# Altium PCB PCB1.pcbdoc
Units mil, origin at the board's own origin, x right, y up, seen from the top; angles counter-clockwise.
Board outline 7520 x 4820 mil, 2 copper layers (Top Layer, Bottom Layer); 59 components, 55 nets, 250 pads, 49 vias.
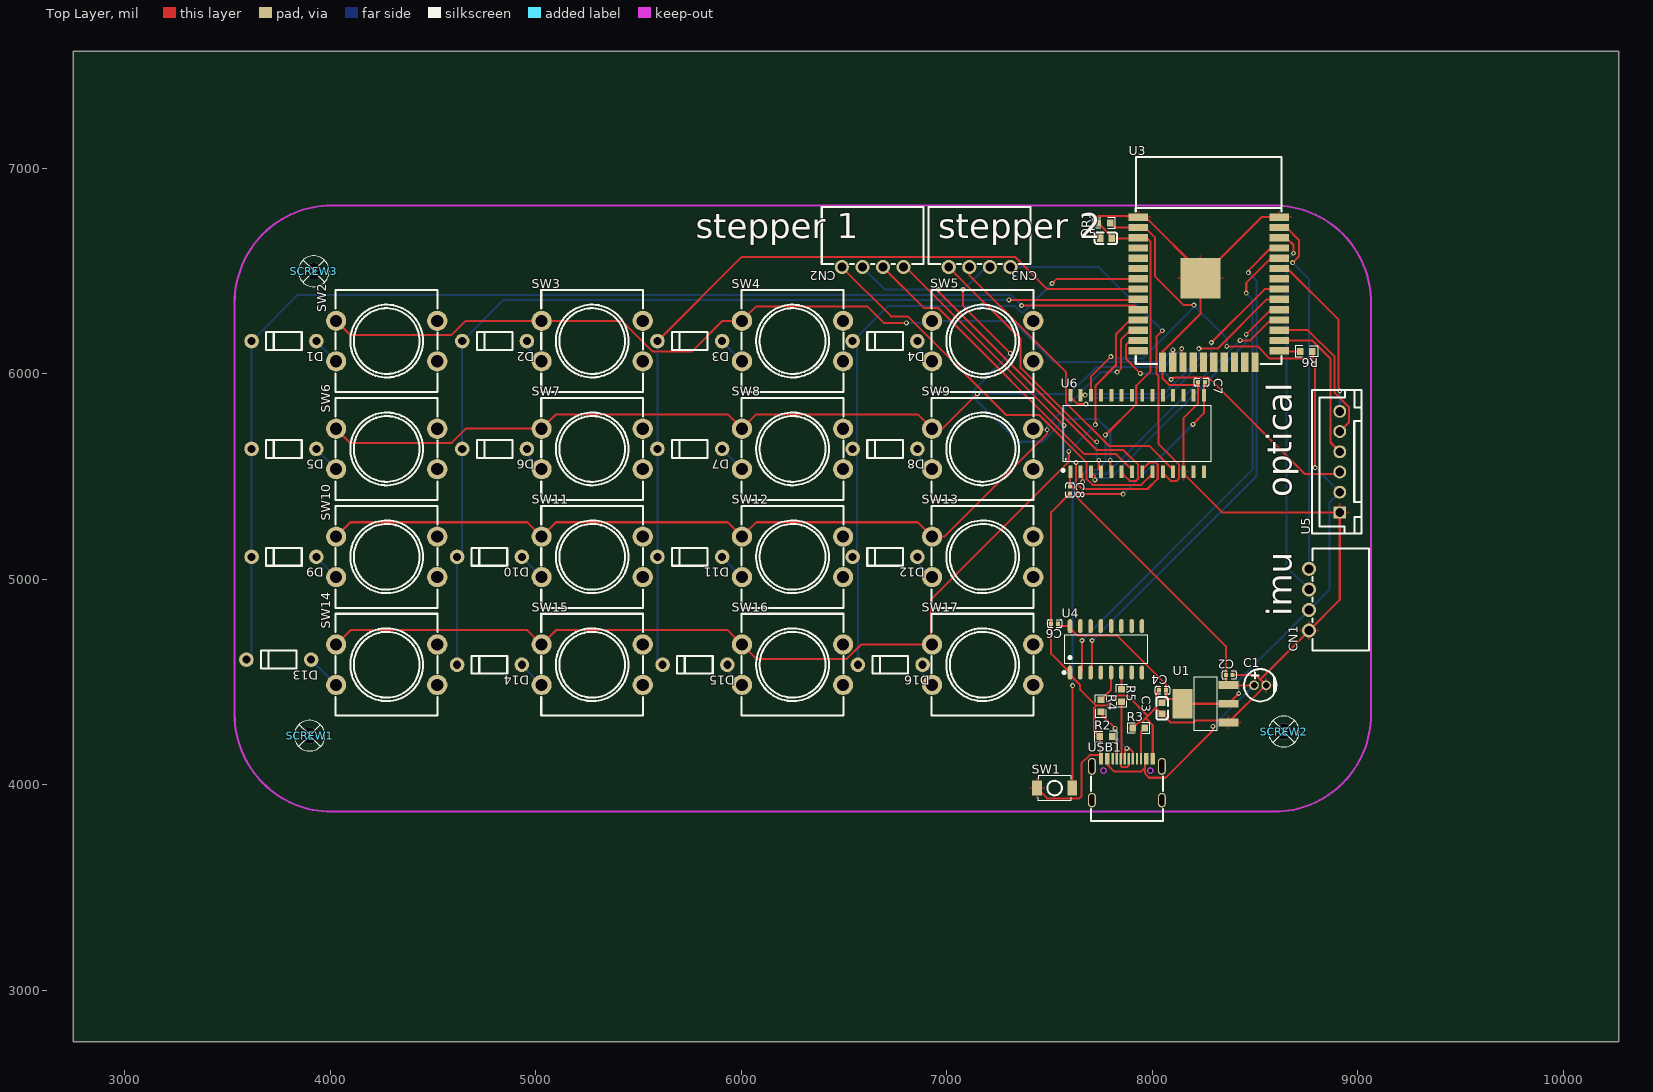
[diagram p0: Top Layer view]
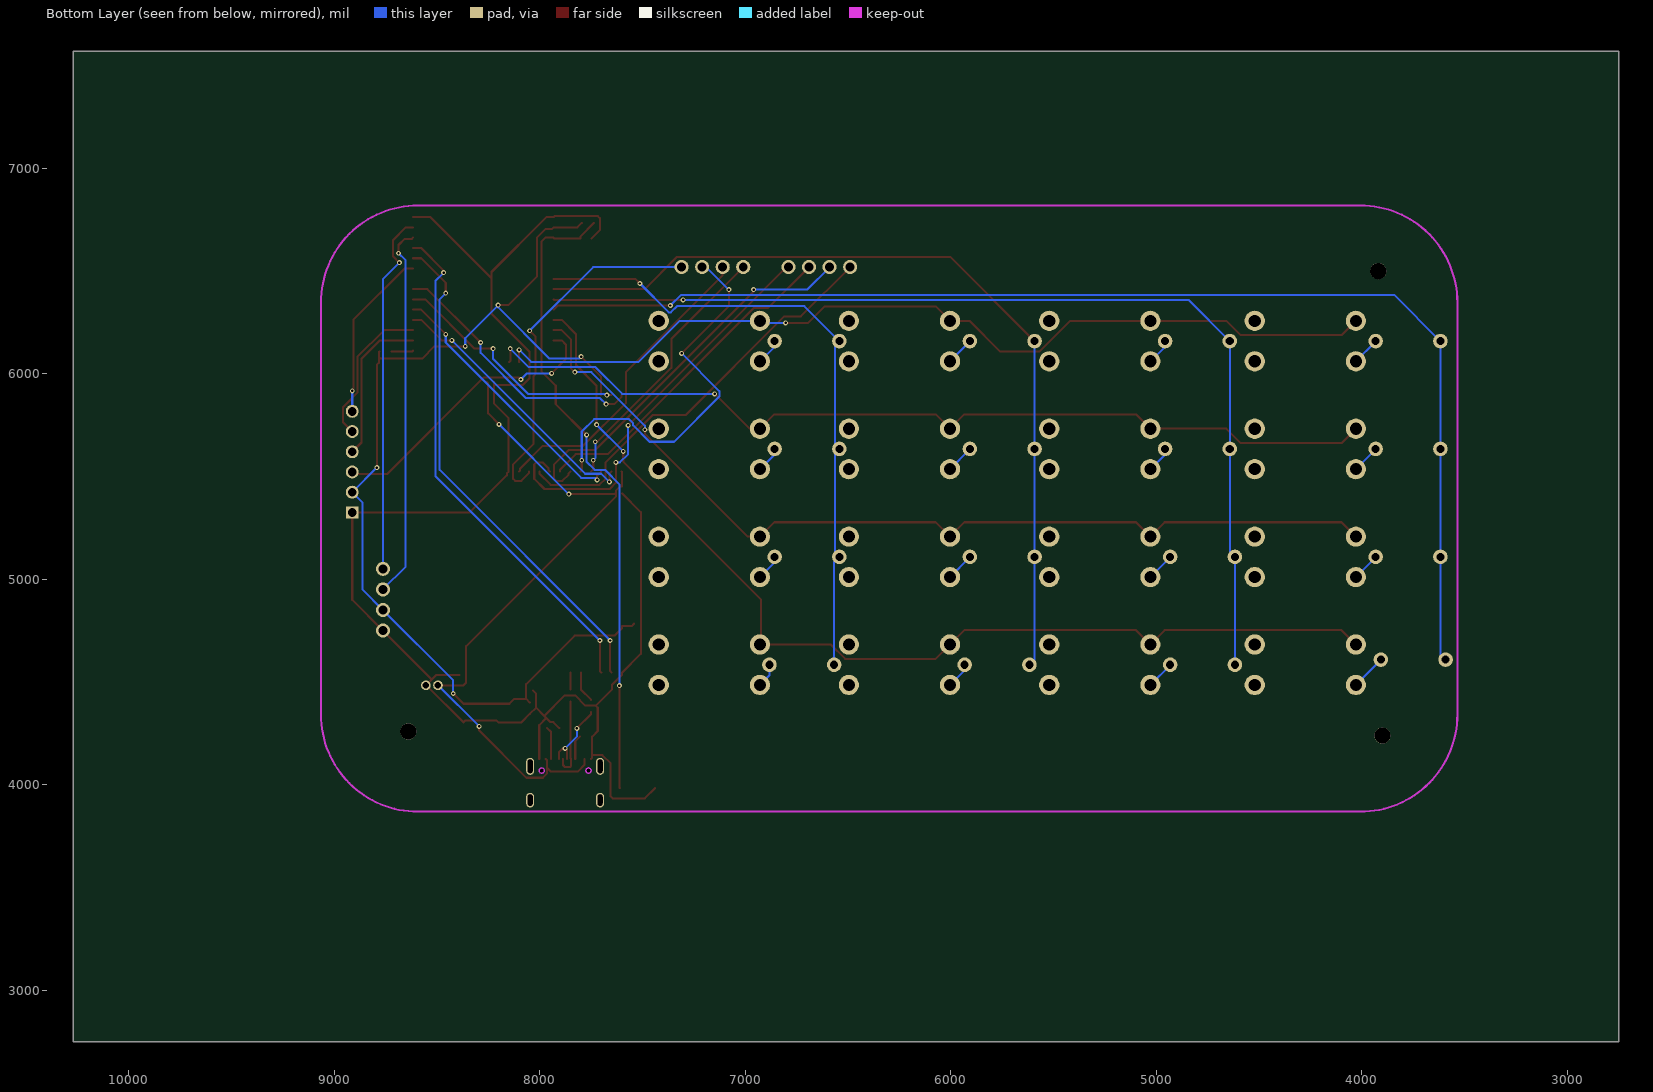
[diagram p1: Bottom Layer view, seen from below]

## Layer stack, top to bottom
Top Layer: signal copper (thickness not stored)
Dielectric: dielectric 12.6, FR-4, Dk 4.8
Bottom Layer: signal copper (thickness not stored)

## Board outline
10270,2750 2750,2750 2750,7570 10270,7570

## Design rules (kind name [scope] priority, off if disabled: settings)
BoardOutlineClearance copperThickness1oz [All] p0: genericclearance=10 ignorepadtopadclearanceinfootprint=FALSE except(0: Arc-SplitContinuation Track-SplitContinuation SMDPad-SplitContinuation THPad-SplitContinuation Via-SplitContinuation Fill-SplitContinuation Poly-SplitContinuation Region-SplitContinuation Text-SplitContinuation; 6: Track-CutoutEdge SMDPad-CutoutEdge THPad-CutoutEdge Via-CutoutEdge Region-CutoutEdge; 11.8: Track-OutlineEdge SMDPad-OutlineEdge THPad-OutlineEdge Via-OutlineEdge Fill-OutlineEdge Region-OutlineEdge Poly-OutlineEdge Text-OutlineEdge Fill-CutoutEdge)
BoardOutlineClearance copperThickness2oz [All] p0: genericclearance=10 ignorepadtopadclearanceinfootprint=FALSE except(0: Arc-SplitContinuation Track-SplitContinuation SMDPad-SplitContinuation THPad-SplitContinuation Via-SplitContinuation Fill-SplitContinuation Poly-SplitContinuation Region-SplitContinuation Text-SplitContinuation; 6: Track-CutoutEdge SMDPad-CutoutEdge THPad-CutoutEdge Via-CutoutEdge Region-CutoutEdge; 11.8: Track-OutlineEdge SMDPad-OutlineEdge THPad-OutlineEdge Via-OutlineEdge Fill-OutlineEdge Region-OutlineEdge Poly-OutlineEdge Text-OutlineEdge Fill-CutoutEdge)
Clearance copperThickness1oz [(InNet('GND') OR InNet('5V') OR InNet('3V') OR InNet('$1N9618') OR InNet('I2C_SCL') OR InNet('I2C_SDA') OR InNet('$1N9409') OR InNet('$1N9399') OR InNet('$1N9415') OR InNet('$1N9421') OR InNet('$1N9528') OR InNet('$1N9517') OR InNet('$1N9494') OR InNet('$1N9486') OR InNet('$1N8707') OR InNet('C0') OR InNet('$1N8711') OR InNet('C1') OR InNet('$1N8715') OR InNet('C2') OR InNet('$1N8723') OR InNet('C3') OR InNet('$1N8725') OR InNet('$1N8733') OR InNet('$1N8735') OR InNet('$1N8737') OR InNet('$1N8739') OR InNet('$1N8741') OR InNet('$1N8743') OR InNet('$1N8745') OR InNet('$1N8747') OR InNet('$1N8749') OR InNet('$1N8751') OR InNet('$1N8757') OR InNet('$1N8376') OR InNet('$1N8394') OR InNet('$1N8413') OR InNet('$1N8434') OR InNet('$1N8441') OR InNet('$1N8466') OR InNet('$1N9798') OR InNet('ROW0') OR InNet('ROW1') OR InNet('ROW2') OR InNet('ROW3') OR InNet('FLOW_MISO') OR InNet('FLOW_MOSI') OR InNet('FLOW_SCLK') OR InNet('M2_DIR') OR InNet('M2_STEP') OR InNet('M1_DIR') OR InNet('M1_STEP') OR InNet('FLOW_CS') OR InNet('RX') OR InNet('TX'))] p1: gap=7 ignorepadtopadclearanceinfootprint=FALSE except(4: Track-Track; 6: Track-SMDPad SMDPad-SMDPad Track-THPad SMDPad-THPad THPad-THPad Track-Via SMDPad-Via THPad-Via Via-Via SMDPad-Fill THPad-Fill Via-Fill Fill-Fill Track-Region SMDPad-Region THPad-Region Via-Region Region-Region Track-Poly SMDPad-Poly THPad-Poly Via-Poly Fill-Poly Region-Poly Poly-Poly Track-Text SMDPad-Text THPad-Text Via-Text Fill-Text Region-Text Poly-Text Text-Text; 6.9: Track-Hole SMDPad-Hole THPad-Hole Via-Hole Fill-Hole Region-Hole Poly-Hole Text-Hole Sheet-Hole; 11.8: Track-Fill Fill-Region Track-Sheet SMDPad-Sheet THPad-Sheet Via-Sheet Fill-Sheet Region-Sheet Poly-Sheet Text-Sheet)
Clearance copperThickness2oz [All] p1: gap=7 ignorepadtopadclearanceinfootprint=FALSE except(6: Track-SMDPad SMDPad-SMDPad Track-THPad SMDPad-THPad THPad-THPad Track-Via SMDPad-Via THPad-Via Via-Via SMDPad-Fill THPad-Fill Via-Fill Fill-Fill Track-Region SMDPad-Region THPad-Region Via-Region Region-Region Track-Poly SMDPad-Poly THPad-Poly Via-Poly Fill-Poly Region-Poly Poly-Poly Track-Text SMDPad-Text THPad-Text Via-Text Fill-Text Region-Text Poly-Text Text-Text; 6.9: Track-Hole SMDPad-Hole THPad-Hole Via-Hole Fill-Hole Region-Hole Poly-Hole Text-Hole Sheet-Hole; 8: Track-Track; 11.8: Track-Fill Fill-Region Track-Sheet SMDPad-Sheet THPad-Sheet Via-Sheet Fill-Sheet Region-Sheet Poly-Sheet Text-Sheet)
DiffPairsRouting differentialPair [All] p1: maxuncoupledlength=10 minlimit=6 maxlimit=6 mostfreqgap=6 toplayer_minwidth=5 toplayer_prefwidth=10 toplayer_maxwidth=100 bottomlayer_minwidth=5 bottomlayer_prefwidth=10 bottomlayer_maxwidth=100
PasteMaskExpansion pasteMaskExpansion [All] p1: expansion=0
PlaneConnect innerPlane [All] p1: planeconnectstyle=Relief reliefexpansion=20 reliefentries=4 reliefconductorwidth=10 reliefairgap=10
PolygonConnect copperRegion [All] p1: connectstyle=Relief reliefentries=4 reliefconductorwidth=10 polygonreliefangle="90 Angle" airgapwidth=10
RoutingVias viaSize [All] p1: viastyle="Through Hole" holewidth=12.0078 minholewidth=11.811 maxholewidth=248.0314 width=24.0158 minwidth=19.685 maxwidth=393.7008
SolderMaskExpansion solderMaskExpansion [All] p1: useseparateexpansions=TRUE expansion=2 expansionbottom=2
Width copperThickness1oz [All] p1: maxlimit=100 minlimit=5 preferedwidth=10
Width copperThickness2oz [All] p1: maxlimit=100 minlimit=8 preferedwidth=10

## Components (designator, comment, footprint, x,y, rotation, side; value= is the part's Value field where it differs from the comment)
C1 "KF106M025C05RR0VH2FP0" CAP-TH_BD4.0-P1.50-D0.8-FD 8525,4485 r0 top
C2 "CC0402KRX5R9BB104" C0402 8375,4535 r180 top
C3 "FCC0603X226M100CT" C0603 8048,4373.13 r270 top
C4 "CC0402KRX5R9BB104" C0402 8050,4460 r180 top
C5 "CC0603JRX7R7BB105" C0603 7775,6660 r0 top
C6 "CC0402KRX5R9BB104" C0402 7525,4785 r180 top
C7 "HGC0402R5475M100NTEJ" C0402 8240,5960 r180 top
C8 "CC0402KRX5R9BB104" C0402 7600,5435 r270 top
CN1 "XH-4AW_C2908613" CONN-TH_XH-4AW 8763.34,4901.51 r90 top
CN2 "XH-4AW_C2908613" CONN-TH_XH-4AW 6640,6520 r180 top
CN3 "XH-4AW_C2908613" CONN-TH_XH-4AW 7160,6520 r180 top
D1 "1N4148_C258182" DO-35_BD2.0-L4.0-P8.00-D0.5-FD 3775,6160 r180 top
D2 "1N4148_C258182" DO-35_BD2.0-L4.0-P8.00-D0.5-FD 4800,6160 r180 top
D3 "1N4148_C258182" DO-35_BD2.0-L4.0-P8.00-D0.5-FD 5750,6160 r180 top
D4 "1N4148_C258182" DO-35_BD2.0-L4.0-P8.00-D0.5-FD 6700,6160 r180 top
D5 "1N4148_C258182" DO-35_BD2.0-L4.0-P8.00-D0.5-FD 3775,5635 r180 top
D6 "1N4148_C258182" DO-35_BD2.0-L4.0-P8.00-D0.5-FD 4800,5635 r180 top
D7 "1N4148_C258182" DO-35_BD2.0-L4.0-P8.00-D0.5-FD 5750,5635 r180 top
D8 "1N4148_C258182" DO-35_BD2.0-L4.0-P8.00-D0.5-FD 6700,5635 r180 top
D9 "1N4148_C258182" DO-35_BD2.0-L4.0-P8.00-D0.5-FD 3775,5110 r180 top
D10 "1N4148_C258182" DO-35_BD2.0-L4.0-P8.00-D0.5-FD 4775,5110 r180 top
D11 "1N4148_C258182" DO-35_BD2.0-L4.0-P8.00-D0.5-FD 5750,5110 r180 top
D12 "1N4148_C258182" DO-35_BD2.0-L4.0-P8.00-D0.5-FD 6700,5110 r180 top
D13 "1N4148_C258182" DO-35_BD2.0-L4.0-P8.00-D0.5-FD 3750,4610 r180 top
D14 "1N4148_C258182" DO-35_BD2.0-L4.0-P8.00-D0.5-FD 4775,4585 r180 top
D15 "1N4148_C258182" DO-35_BD2.0-L4.0-P8.00-D0.5-FD 5775,4585 r180 top
D16 "1N4148_C258182" DO-35_BD2.0-L4.0-P8.00-D0.5-FD 6725,4585 r180 top
R1 "FRC0603J103 TS" R0603 7765.68,6735 r0 top
R2 "FRC0603F5101TS" R0603 7775,4235 r0 top
R3 "FRC0603F5101TS" R0603 7934.66,4276.6 r0 top
R4 "FRC0603J220 TS" R0603 7750,4385 r270 top
R5 "FRC0603J220 TS" R0603 7850,4435 r270 top
R6 "FRC0603J103 TS" R0603 8750,6110 r180 top
SCREW1 "Screw-Hole-M2" Screw-Hole-M2 3900,4240 r0 top
SCREW2 "Screw-Hole-M2" Screw-Hole-M2 8640,4260 r0 top
SCREW3 "Screw-Hole-M2" Screw-Hole-M2 3920,6500 r0 top
SW1 "TS-1088-AR02016" SW-SMD_L3.9-W3.0-P4.45 7525,3985 r0 top
SW2 "12x12x7.3 黄头" SW-TH_4P-L12.0-W12.0-P5.00-LS12.5 4275,6160 r0 top
SW3 "12x12x7.3 黄头" SW-TH_4P-L12.0-W12.0-P5.00-LS12.5 5275,6160 r0 top
SW4 "12x12x7.3 黄头" SW-TH_4P-L12.0-W12.0-P5.00-LS12.5 6250,6160 r0 top
SW5 "12x12x7.3 黄头" SW-TH_4P-L12.0-W12.0-P5.00-LS12.5 7175,6160 r0 top
SW6 "12x12x7.3 黄头" SW-TH_4P-L12.0-W12.0-P5.00-LS12.5 4275,5635 r0 top
SW7 "12x12x7.3 黄头" SW-TH_4P-L12.0-W12.0-P5.00-LS12.5 5275,5635 r0 top
SW8 "12x12x7.3 黄头" SW-TH_4P-L12.0-W12.0-P5.00-LS12.5 6250,5635 r0 top
SW9 "12x12x7.3 黄头" SW-TH_4P-L12.0-W12.0-P5.00-LS12.5 7175,5635 r0 top
SW10 "12x12x7.3 黄头" SW-TH_4P-L12.0-W12.0-P5.00-LS12.5 4275,5110 r0 top
SW11 "12x12x7.3 黄头" SW-TH_4P-L12.0-W12.0-P5.00-LS12.5 5275,5110 r0 top
SW12 "12x12x7.3 黄头" SW-TH_4P-L12.0-W12.0-P5.00-LS12.5 6250,5110 r0 top
SW13 "12x12x7.3 黄头" SW-TH_4P-L12.0-W12.0-P5.00-LS12.5 7175,5110 r0 top
SW14 "12x12x7.3 黄头" SW-TH_4P-L12.0-W12.0-P5.00-LS12.5 4275,4585 r0 top
SW15 "12x12x7.3 黄头" SW-TH_4P-L12.0-W12.0-P5.00-LS12.5 5275,4585 r0 top
SW16 "12x12x7.3 黄头" SW-TH_4P-L12.0-W12.0-P5.00-LS12.5 6250,4585 r0 top
SW17 "12x12x7.3 黄头" SW-TH_4P-L12.0-W12.0-P5.00-LS12.5 7175,4585 r0 top
U1 "AMS1117-3.3V_C2688239" SOT-223-4_L6.5-W3.5-P2.30-LS7.0-BR 8259.66,4395.02 r0 top
U3 "ESP32-WROOM-32-N8" WIFIM-SMD_39P-L25.5-W18.0-P1.27 8275,6410 r0 top
U4 "CH340C" SOP-16_L10.0-W3.9-P1.27-LS6.0-BL 7775,4660 r0 top
U5 "ZX-XH2.54-6PZZ" CONN-TH_6P-P2.50_ZX-XH2.54-6PZZ 8912.67,5572.12 r90 top
U6 "VID6606" SOP-28_L18.1-W7.6-P1.27-LS10.3-BL 7926.5,5710.66 r0 top
USB1 "TYPE-C-16PIN_C53207801" USB-C-SMD_TYPE-C16PIN-SHOUHAN 7876.74,4026.6 r0 top

## Footprints (in the part's own frame and the unit in brackets; to place one, negate y for a bottom-side part, rotate by r counter-clockwise, add the part's x,y. Pads: shape width x height; smd on the part's side, far side on the other; paste and mask are expansions set on the pad)
C0402 [mm]
  rect 0.5x0.54 smd: 1(-0.42,0) 2(0.42,0)
  silkscreen extent -0.87,-0.5 0.87,0.5
C0603 [mm]
  rect 0.8x0.9 smd: 1(-0.7,0) 2(0.7,0)
  silkscreen extent -1.39,-0.71 1.39,0.71
CAP-TH_BD4.0-P1.50-D0.8-FD [mm]
  round 1.2 hole 0.8: 1(-0.75,0) 2(0.75,0)
  silkscreen extent -1.98,-2 2.06,2
CONN-TH_6P-P2.50_ZX-XH2.54-6PZZ [mm]
  rect 1.524x1.6 hole 1.1: 1(-6.25,0)
  round 1.6 hole 1.1 copper offset 0,0: 2(-3.75,0) 4(1.25,0) 5(3.75,0) 6(6.25,0)
  round 1.6 hole 1.1: 3(-1.25,0)
  silkscreen extent -8.87,-2.68 8.87,3.42
CONN-TH_XH-4AW [mm]
  round 1.75 hole 1.1: 1(-3.81,0) 2(-1.27,0) 3(1.27,0) 4(3.81,0)
  silkscreen extent -6.3,-7.4 6.3,-0.4
DO-35_BD2.0-L4.0-P8.00-D0.5-FD [mm]
  round 1.8 hole 1: 1(-4,0) 2(4,0)
  silkscreen extent -2.2,-1.1 2.2,1.1
R0603 [mil]
  rect 31.75x34.02 smd: 1(-29.66,0) 2(29.66,0)
  silkscreen extent -55,-26 55,26
Screw-Hole-M2 [mm]
  round 2 hole 2: 1(0,0)
  silkscreen extent -1.9,-1.9 1.9,1.9
SOP-16_L10.0-W3.9-P1.27-LS6.0-BL [mm]
  oval 0.56x1.745 smd: 1(-4.445,-2.872) 2(-3.175,-2.872) 3(-1.905,-2.872) 4(-0.635,-2.872) 5(0.635,-2.872) 6(1.905,-2.872) 7(3.175,-2.872) 8(4.445,-2.872) 9(4.445,2.872) 10(3.175,2.872) 11(1.905,2.872) 12(0.635,2.872) 13(-0.635,2.872) 14(-1.905,2.872) 15(-3.175,2.872) 16(-4.445,2.872)
  silkscreen extent -5.33,-3.02 5.08,1.77
SOP-28_L18.1-W7.6-P1.27-LS10.3-BL [mm]
  rect 0.49x1.56 smd: 1(-8.255,-4.73) 2(-6.985,-4.73) 3(-5.715,-4.73) 4(-4.445,-4.73) 5(-3.175,-4.73) 6(-1.905,-4.73) 7(-0.635,-4.73) 8(0.635,-4.73) 9(1.905,-4.73) 10(3.175,-4.73) 11(4.445,-4.73) 12(5.715,-4.73) 13(6.985,-4.73) 14(8.255,-4.73) 15(8.255,4.73) 16(6.985,4.73) 17(5.715,4.73) 18(4.445,4.73) 19(3.175,4.73) 20(1.905,4.73) 21(0.635,4.73) 22(-0.635,4.73) 23(-1.905,4.73) 24(-3.175,4.73) 25(-4.445,4.73) 26(-5.715,4.73) 27(-6.985,4.73) 28(-8.255,4.73)
  silkscreen extent -9.29,-4.72 9.13,3.5
SOT-223-4_L6.5-W3.5-P2.30-LS7.0-BR [mm]
  rect 2.47x0.98 smd: 1(2.835,-2.3) 2(2.835,0) 3(2.835,2.3)
  rect 2.47x3.6 smd: 4(-2.835,0)
  silkscreen extent -1.37,-3.33 1.37,3.33
SW-SMD_L3.9-W3.0-P4.45 [mm]
  rect 1.23x1.86 smd: 1(-2.185,0) 2(2.185,0)
  silkscreen extent -2.03,-1.54 2.03,1.54
SW-TH_4P-L12.0-W12.0-P5.00-LS12.5 [mm]
  round 2.5 hole 1.5: 1(-6.25,2.5) 2(6.25,2.5) 3(-6.25,-2.5) 4(6.25,-2.5)
  silkscreen extent -6.3,-6.3 6.3,6.3
USB-C-SMD_TYPE-C16PIN-SHOUHAN [mm]
  oval 1x2.1 hole 0.6 slot 1.7 at 90 deg: 1(-4.32,1.63) 2(4.32,1.63)
  oval 1x1.8 hole 0.6 slot 1.4 at 90 deg: 3(-4.32,-2.55) 4(4.32,-2.55)
  rect 0.55x1.45 smd: A1B12(-3.2,2.55) A4B9(-2.4,2.55) B1A12(3.2,2.55) B4A9(2.4,2.55)
  rect 0.3x1.45 smd: A5(-1.25,2.55) A6(-0.25,2.55) A7(0.25,2.55) A8(1.25,2.55) B5(1.75,2.55) B6(0.75,2.55) B7(-0.75,2.55) B8(-1.75,2.55)
  Board Outline Layer circle w0.005: c-2.89,1.1 r0.325
  Board Outline Layer circle w0.005: c2.89,1.1 r0.325
  Board Outline Layer region: -2.565,1.1 -2.597,0.959 -2.687,0.846 -2.818,0.783 -2.962,0.783 -3.093,0.846 -3.183,0.959 -3.215,1.1 -3.215,1.1 -3.183,1.241 -3.093,1.354 -2.962,1.417 -2.818,1.417 -2.687,1.354 -2.597,1.241 -2.565,1.1
  Board Outline Layer region: 3.215,1.1 3.183,0.959 3.093,0.846 2.962,0.783 2.818,0.783 2.687,0.846 2.597,0.959 2.565,1.1 2.565,1.1 2.597,1.241 2.687,1.354 2.818,1.417 2.962,1.417 3.093,1.354 3.183,1.241 3.215,1.1
  Multi-Layer board cut-out: -2.565,1.1 -2.597,0.959 -2.687,0.846 -2.818,0.783 -2.962,0.783 -3.093,0.846 -3.183,0.959 -3.215,1.1 -3.215,1.1 -3.183,1.241 -3.093,1.354 -2.962,1.417 -2.818,1.417 -2.687,1.354 -2.597,1.241 -2.565,1.1
  Multi-Layer board cut-out: 3.215,1.1 3.183,0.959 3.093,0.846 2.962,0.783 2.818,0.783 2.687,0.846 2.597,0.959 2.565,1.1 2.565,1.1 2.597,1.241 2.687,1.354 2.818,1.417 2.962,1.417 3.093,1.354 3.183,1.241 3.215,1.1
  silkscreen extent -4.45,-5.15 4.45,0.36
WIFIM-SMD_39P-L25.5-W18.0-P1.27 [mm]
  rect 2.4x0.9 smd: 1(-8.7,8.965) 2(-8.7,7.695) 3(-8.7,6.425) 4(-8.7,5.155) 5(-8.7,3.885) 6(-8.7,2.615) 7(-8.7,1.345) 8(-8.7,0.075) 9(-8.7,-1.195) 10(-8.7,-2.465) 11(-8.7,-3.735) 12(-8.7,-5.005) 13(-8.7,-6.275) 14(-8.7,-7.545) 25(8.7,-7.545) 26(8.7,-6.275) 27(8.7,-5.005) 28(8.7,-3.735) 29(8.7,-2.465) 30(8.7,-1.195) 31(8.7,0.075) 32(8.7,1.345) 33(8.7,2.615) 34(8.7,3.885) 35(8.7,5.155) 36(8.7,6.425) 37(8.7,7.695) 38(8.7,8.965)
  rect 0.9x2.4 smd: 15(-5.715,-8.965) 16(-4.445,-8.965) 17(-3.175,-8.965) 18(-1.905,-8.965) 19(-0.635,-8.965) 20(0.635,-8.965) 21(1.905,-8.965) 22(3.175,-8.965) 23(4.445,-8.965) 24(5.715,-8.965)
  rect 5x5 smd: 39(-1.017,1.422)
  silkscreen extent -9.02,-9.17 9.02,16.39

## Via types
v1: diameter 24.02, hole 12.01, Top Layer to Bottom Layer, 49 vias

## Nets (pads, with @x,y where several pads share a name; then routed paths per layer and width w, separated by ;. In a path a pad name is that pad's centre, name@x,y a point inside that pad or via, vN(x,y) a via of type N, cw(c..) or ccw(c..) an arc to the next point about the centre after c; other vN are vias at no path point)
3V: C3.1 C4.1 C6.1 CN1.2 R1.2 R6.1 U1.2 U1.4 U3.2 U4.16 U5.2 U6.26 | length 5208.2
  Top Layer w10: C6.1 7553.45,4773.09 U4.16 7600,4763.09 7636.54,4726.55 7829.99,4726.55 8066.54,4490 C4.1 8066.54,4419.24 ; U6.26 7701.5,5986.88 v1(7799.1,6084.49) ; R1.2 7817.38,6712.96 U3.2 7940.95,6704.49 7972.67,6704.49 8012.67,6664.49 8012.67,6474.49 8152.67,6334.49 v1(8202.67,6334.49) ; C3.1 8066.54,4419.24 ; v1(8362.67,6134.49) 8512.67,6134.49 8572.67,6074.49 8772.67,6074.49 8782.67,6084.49 ; v1(8421.27,4445.02) U1.2 U1.4 8123.84,4419.24 8066.54,4419.24 ; R6.1 8782.67,6106.99 8782.67,6084.49 ; v1(8792.67,5544.49) 8792.67,6044.49 8782.67,6054.49 8782.67,6084.49
  Bottom Layer w10: v1(7799.1,6084.49) 7809.1,6074.49 7952.67,6074.49 8202.67,6324.49 v1(8202.67,6334.49) 8362.67,6174.49 v1(8362.67,6134.49) ; v1(8421.27,4445.02) 8421.27,4509.45 CN1.2 8863.34,4951.51 8863.34,5375.15 U5.2 v1(8792.67,5544.49)
5V: C1.1 C2.2 C7.1 C8.1 U1.3 U6.1 U6.15 USB1.A4B9 USB1.B4A9 | length 3478.1
  Top Layer w10: U6.1 7600,5522.94 C8.1 7610,5451.54 7628.46,5433.08 7628.46,5425 ; USB1.A4B9 7782.26,4098.22 7815.47,4065 7945.47,4065 7965.47,4085 ; v1(7858.46,5415) 7638.46,5415 7628.46,5425 ; USB1.B4A9 7965.47,4121.23 7965.47,4085 ; v1(8198.46,5755) 8251.5,5808.04 U6.15 8251.5,5954.96 C7.1 ; v1(8295.47,4285) 8295.47,4265 8065.47,4035 7985.47,4035 7965.47,4055 7965.47,4085 ; C1.1 8371.84,4485 U1.3 8358.46,4498.38 C2.2 8358.46,4675 7628.46,5405 7628.46,5425
  Bottom Layer w10: v1(7858.46,5415) v1(8198.46,5755) ; v1(8295.47,4285) C1.1
$1N8376: R2.2 USB1.A5 | length 117.5
  Top Layer w10: R2.2 7827.53,4212.12 USB1.A5
$1N8394: R3.2 USB1.B5 | length 157.3
  Top Layer w10: USB1.B5 7945.65,4257.92 R3.2
$1N8413: R4.2 USB1.A6 USB1.B6 | length 355
  Top Layer w10: R4.2 7750,4345.34 v1(7820,4275.34) ; USB1.A6 7866.9,4168.44 v1(7876.9,4178.44) 7886.9,4178.44 7906.9,4158.44 7906.9,4127.63 USB1.B6
  Bottom Layer w10: v1(7820,4275.34) 7820,4235.34 v1(7876.9,4178.44)
$1N8434: R4.1 U4.5 | length 153
  Top Layer w10: R4.1 7800,4464.66 U4.5
$1N8441: R5.2 USB1.A7 USB1.B7 | length 390.5
  Top Layer w10: R5.2 7850,4129.79 USB1.B7 7847.22,4092.77 7852.98,4087 7877.22,4087 7887.22,4097 7887.22,4126.37 USB1.A7
$1N8466: R5.1 U4.6 | length 82.2
  Top Layer w10: R5.1 U4.6
$1N8707: D1.1 SW2.3 | length 138.4
  Bottom Layer w10: D1.1 3932.48,6158.03 SW2.3
$1N8711: D2.1 SW3.3 | length 128
  Bottom Layer w10: D2.1 4957.48,6133.03 SW3.3
$1N8715: D3.1 SW4.3 | length 138.4
  Bottom Layer w10: D3.1 5907.48,6158.03 SW4.3
$1N8723: D4.1 SW5.3 | length 128
  Bottom Layer w10: D4.1 6857.48,6133.03 SW5.3
$1N8725: D5.1 SW6.3 | length 138.4
  Bottom Layer w10: D5.1 3932.48,5633.03 SW6.3
$1N8733: D6.1 SW7.3 | length 128
  Bottom Layer w10: D6.1 4957.48,5608.03 SW7.3
$1N8735: D7.1 SW8.3 | length 138.4
  Bottom Layer w10: D7.1 5907.48,5633.03 SW8.3
$1N8737: D8.1 SW9.3 | length 128
  Bottom Layer w10: D8.1 6857.48,5608.03 SW9.3
$1N8739: D9.1 SW10.3 | length 138.4
  Bottom Layer w10: D9.1 3932.48,5108.03 SW10.3
$1N8741: D10.1 SW11.3 | length 138.4
  Bottom Layer w10: D10.1 4932.48,5108.03 SW11.3
$1N8743: D11.1 SW12.3 | length 138.4
  Bottom Layer w10: D11.1 5907.48,5108.03 SW12.3
$1N8745: D12.1 SW13.3 | length 128
  Bottom Layer w10: D12.1 6857.48,5083.03 SW13.3
$1N8747: D13.1 SW14.3 | length 173.7
  Bottom Layer w10: D13.1 3907.48,4608.03 SW14.3
$1N8749: D14.1 SW15.3 | length 138.4
  Bottom Layer w10: D14.1 4932.48,4583.03 SW15.3
$1N8751: D15.1 SW16.3 | length 128
  Bottom Layer w10: D15.1 5932.48,4558.03 SW16.3
$1N8757: D16.1 SW17.3 | length 117.7
  Bottom Layer w10: D16.1 6882.48,4533.03 SW17.3
$1N9399: CN2.2 U6.7 | length 1629.7
  Top Layer w10: CN2.2 6890,6320 6960,6320 7670,5610 7825.94,5610 7901.5,5534.44 U6.7
$1N9409: CN2.1 U6.8 | length 2020.1
  Top Layer w10: CN2.1 6800,6520 v1(7570,5750) ; v1(7630,5570) 7630,5470 7660,5440 7977.06,5440 8027.06,5490 8027.06,5560 8017.06,5570 7987.06,5570 7957.06,5540 7957.06,5530 U6.8
  Bottom Layer w10: v1(7570,5750) 7570,5610 7610,5570 v1(7630,5570)
$1N9415: CN2.3 U6.6 | length 1918
  Top Layer w10: v1(6960,6410) 6960,6400 7730,5630 7860,5630 7930,5560 7930,5490 7920,5480 7890,5480 7860,5510 7860,5515.94 U6.6
  Bottom Layer w10: CN2.3 6700,6410 v1(6960,6410)
$1N9421: CN2.4 U6.9 | length 2030
  Top Layer w10: CN2.4 6730,6280 6810,6280 7290,5800 7450,5800 7680,5570 7680,5490 7710,5460 7947.06,5460 8001.5,5514.44 U6.9
$1N9486: CN3.4 U6.4 | length 1308.6
  Top Layer w10: CN3.4 7360,6170 7360,6030 7720,5670 v1(7730,5670) ; v1(7740,5580) 7740,5535.94 U6.4
  Bottom Layer w10: v1(7730,5670) 7730,5590 v1(7740,5580)
$1N9494: CN3.3 U6.11 | length 1521
  Top Layer w10: CN3.3 7110,6480 7580,6010 7580,5860 7790,5650 7985.94,5650 8095.94,5540 8095.94,5530 U6.11
$1N9517: CN3.2 U6.5 | length 1902.3
  Top Layer w10: v1(7080,6410) 7080,6330 v1(7310,6100) ; v1(7795.94,5580) 7795.94,5530 U6.5
  Bottom Layer w10: v1(7080,6410) 7190,6520 CN3.2 ; v1(7310,6100) 7125.94,5915.94 7125.94,5890 7345.94,5670 7465.94,5670 7545.94,5750 7545.94,5760 7565.94,5780 7735.94,5780 7795.94,5720 v1(7795.94,5580)
$1N9528: CN3.1 U6.10 | length 1750.9
  Top Layer w10: v1(8050,6210) 8020,6180 8020,6000 8030,5990 8030,5660 8130,5560 8130,5490 8120,5480 8090,5480 8051.5,5518.5 U6.10
  Bottom Layer w10: CN3.1 7740,6520 v1(8050,6210)
$1N9618: C5.2 R1.1 SW1.2 U3.3 | length 3147.3
  Top Layer w10: SW1.2 7612.49,3986.47 v1(7612.49,4482.96) ; R1.1 7802.56,6668.46 C5.2 7929.53,6660 U3.3 7972.49,6662.96 7992.49,6642.96 7992.49,6012.96 7922.49,5942.96 7922.49,5852.96 v1(7772.49,5702.96)
  Bottom Layer w10: v1(7612.49,4482.96) 7612.49,5462.96 7682.49,5532.96 7732.49,5532.96 7772.49,5572.96 v1(7772.49,5702.96)
$1N9798: R6.2 U3.25 | length 104.1
  Top Layer w10: U3.25 8620.47,6110 R6.2
C0: D1.2 D5.2 D9.2 D13.2 U3.10 | length 5998.3
  Top Layer w10: v1(7364.56,6332.96) 7912.49,6332.96 U3.10
  Bottom Layer w10: D13.2 3617.52,4635 D9.2 D5.2 D1.2 3842.48,6384.96 7312.56,6384.96 v1(7364.56,6332.96)
C1: D2.2 D6.2 D10.2 D14.2 U3.9 | length 4959.4
  Top Layer w10: v1(7302.52,6360) 7929.53,6360 U3.9
  Bottom Layer w10: D14.2 D10.2 4642.52,5135 D6.2 D2.2 4842.52,6360 v1(7302.52,6360)
C2: D3.2 D7.2 D11.2 D15.2 U3.8 | length 4160.2
  Top Layer w10: D3.2 6002.52,6570 7332.52,6570 7489.56,6412.96 U3.8
  Bottom Layer w10: D3.2 D7.2 D11.2 5592.52,4610 D15.2
C3: D4.2 D8.2 D12.2 D16.2 U3.7 | length 3158.8
  Top Layer w10: v1(7512.52,6440) 7535.48,6462.96 U3.7
  Bottom Layer w10: D16.2 6567.52,5085 D12.2 6562.52,5130 6562.52,5615 D8.2 6562.52,5655 6562.52,6140 D4.2 6712.52,6330 7332.52,6330 7362.52,6300 7372.52,6300 v1(7512.52,6440)
FLOW_CS: U3.33 U5.6 | length 840.4
  Top Layer w10: U3.33 8657.51,6512.96 8907.51,6262.96 8907.51,5922.96 v1(8912.67,5917.8)
  Bottom Layer w10: U5.6 v1(8912.67,5917.8)
FLOW_MISO: U3.13 U5.3 | length 1422.9
  Top Layer w10: U3.13 7892.49,6162.96 7872.49,6142.96 7872.49,6072.96 v1(7942.49,6002.96) ; v1(8092.49,5972.96) 8102.49,5982.96 8272.49,5982.96 8742.53,5512.91 8902.67,5512.91 U5.3
  Bottom Layer w10: v1(7942.49,6002.96) 8062.49,6002.96 v1(8092.49,5972.96)
FLOW_MOSI: U3.26 U5.4 | length 757.6
  Top Layer w10: U3.26 8777.51,6162.96 8867.51,6072.96 8867.51,5666.5 U5.4
FLOW_SCLK: U3.27 U5.5 | length 734.6
  Top Layer w10: U3.27 8757.51,6212.96 8887.51,6082.96 8887.51,5908.73 8957.51,5838.73 8957.51,5764.61 U5.5
GND: C1.2 C2.1 C3.2 C4.2 C5.1 C6.2 C7.2 C8.2 CN1.1 R2.1 R3.1 SW1.1 U1.1 U3.1 U3.15 U3.38 U3.39 U4.1 U5.1 U6.12 USB1.A1B12 USB1.B1A12 | length 7884.8
  Top Layer w10: SW1.1 7488.98,3935 7645.34,3935 7655.34,3945 7655.34,4105 7695.34,4145 USB1.A1B12@7745.34,4145 ; C8.2 7508.46,5326.92 C6.2 7508.46,4638.45 U4.1 7600,4536.91 7648,4488.91 7648,4465.57 7728,4385.57 ; C5.1 7707.44,6700 7707.44,6757.91 7717.44,6767.91 7927.53,6767.91 U3.1 7967.99,6762.96 8234.96,6495.99 U3.39 ; USB1.A1B12 7745.34,4132.41 USB1.A1B12@7745.34,4145 ; R3.1 7933.98,4305.57 7948,4305.57 7968,4325.57 ; USB1.B1A12 8002.73,4290.85 7968,4325.57 ; C4.2 8018,4444.54 8018,4375.57 ; C7.2 C7.2@8223.46,5956.4 ; C2.1 8504.53,4535 8524.53,4515 ; U3.38 8531.93,6762.96 U3.39 ; 7728,4385.57 7778,4385.57 7828,4435.57 7878,4435.57 7978,4335.57 ; 7728,4385.57 7718,4375.57 7718,4262.34 R2.1 USB1.A1B12@7745.34,4145 ; 7968,4325.57 7978,4335.57 ; 7978,4335.57 8018,4375.57 ; 8018,4375.57 C3.2 8089.1,4304.47 8201.27,4304.47 8211.27,4314.47 8361.27,4314.47 U1.1 8551.81,4485 C1.2 8524.53,4515 ; C7.2@8223.46,5956.4 8213.46,5946.4 8083.46,5946.4 8050,5979.86 U3.15 8050,6107.04 8234.96,6292 U3.39 ; C7.2@8223.46,5956.4 8223.46,5856.4 8151.5,5784.44 U6.12 8159.89,5516.05 8159.89,5506.05 8339.89,5326.05 8912.67,5326.05 8912.67,4900.85 CN1.1 8526.82,4515 8524.53,4515
I2C_SCL: CN1.3 U3.36 | length 1820.7
  Top Layer w10: U3.36 8623.14,6657.33 8657.51,6657.33 8687.51,6627.33 v1(8687.51,6587.33)
  Bottom Layer w10: v1(8687.51,6587.33) 8652.87,6552.69 8652.87,5061.98 CN1.3
I2C_SDA: CN1.4 U3.37 | length 1766.8
  Top Layer w10: U3.37 8651.89,6712.96 8713.34,6651.51 8713.34,6571.51 v1(8683.34,6541.51)
  Bottom Layer w10: v1(8683.34,6541.51) 8763.34,6461.51 CN1.4
M1_DIR: U3.30 U6.27 | length 1188.4
  Top Layer w10: U6.27 v1(7673.59,5896.88) ; v1(8227.51,6122.96) 8317.51,6122.96 8557.51,6362.96 U3.30
  Bottom Layer w10: v1(7673.59,5896.88) 7679.66,5902.96 8057.51,5902.96 8227.51,6072.96 v1(8227.51,6122.96)
M1_STEP: U3.31 U6.28 | length 1300.1
  Top Layer w10: U6.28 7601.5,5888.97 7637.51,5852.96 v1(7677.51,5852.96) ; v1(8287.51,6152.96) 8547.51,6412.96 U3.31
  Bottom Layer w10: v1(7677.51,5852.96) 7707.51,5882.96 8067.51,5882.96 8287.51,6102.96 v1(8287.51,6152.96)
M2_DIR: U3.28 U6.2 | length 1336.8
  Top Layer w10: U6.2 7661.5,5514.44 v1(7661.5,5474.44) ; v1(8427.51,6162.96) 8477.51,6162.96 8577.51,6262.96 U3.28
  Bottom Layer w10: v1(7661.5,5474.44) 7701.5,5514.44 7779,5514.44 v1(8427.51,6162.96)
M2_STEP: U3.29 U6.3 | length 1310.9
  Top Layer w10: U6.3 7721.5,5504.44 v1(7721.5,5484.44) ; v1(8457.51,6192.96) 8577.51,6312.96 U3.29
  Bottom Layer w10: v1(7721.5,5484.44) 7731.5,5494.44 7799,5494.44 8457.51,6152.96 v1(8457.51,6192.96)
ROW0: SW2.1 SW3.1 SW4.1 SW5.1 U3.16 | length 4487.2
  Top Layer w10: SW2.1 4098.94,6188.43 4588.94,6188.43 4658.94,6258.43 SW3.1 5418.94,6258.43 5568.94,6108.43 5758.94,6108.43 5908.94,6258.43 SW4.1 6073.94,6328.43 6613.94,6328.43 6693.94,6248.43 v1(6803.94,6248.43) ; U3.16 8100.32,6057.36 v1(8100.32,6117.04)
  Bottom Layer w10: v1(6803.94,6248.43) 6918.94,6248.43 SW5.1 7318.94,6258.43 7518.94,6058.43 8041.7,6058.43 v1(8100.32,6117.04)
ROW1: SW6.1 SW7.1 SW8.1 SW9.1 U3.17 | length 4519.2
  Top Layer w10: SW6.1 4098.94,5663.43 4588.94,5663.43 4658.94,5733.43 SW7.1 5098.94,5803.43 5933.94,5803.43 SW8.1 6073.94,5803.43 6858.94,5803.43 SW9.1 6978.94,5733.43 v1(7148.94,5903.43) ; v1(8143.62,6123.43) 8143.62,6063.43 U3.17
  Bottom Layer w10: v1(7148.94,5903.43) 7598.94,5903.43 7728.94,6033.43 8053.62,6033.43 v1(8143.62,6123.43)
ROW2: SW10.1 SW11.1 SW12.1 SW13.1 U3.12 | length 4599
  Top Layer w10: SW10.1 4098.94,5278.43 4958.94,5278.43 SW11.1 5098.94,5278.43 5933.94,5278.43 SW12.1 6073.94,5278.43 6858.94,5278.43 SW13.1 6988.94,5208.43 7488.94,5708.43 v1(7488.94,5728.43) ; v1(7828.94,6008.43) 7848.94,6028.43 7848.94,6168.43 7893.47,6212.96 U3.12
  Bottom Layer w10: v1(7488.94,5728.43) 7488.94,5748.43 7748.94,6008.43 v1(7828.94,6008.43)
ROW3: SW14.1 SW15.1 SW16.1 SW17.1 U3.11 | length 5094.1
  Top Layer w10: SW14.1 4098.94,4753.43 4958.94,4753.43 SW15.1 5098.94,4753.43 5933.94,4753.43 SW16.1 6073.94,4613.43 6513.94,4613.43 6583.94,4683.43 SW17.1@6923.94,4683.43 ; SW17.1 SW17.1@6923.94,4683.43 ; v1(7593.94,5623.43) 7593.94,5573.43 6923.94,4903.43 SW17.1@6923.94,4683.43 ; v1(7723.94,5753.43) 7723.94,5943.43 7823.94,6043.43 7823.94,6193.43 7893.47,6262.96 U3.11
  Bottom Layer w10: v1(7593.94,5623.43) v1(7723.94,5753.43)
RX: U3.34 U4.2 | length 2465.1
  Top Layer w10: U4.2 7657.51,4554.42 v1(7657.51,4702.96) ; v1(8457.51,6392.96) 8457.51,6442.96 8577.51,6562.96 U3.34
  Bottom Layer w10: v1(7657.51,4702.96) 8487.51,5532.96 8487.51,6362.96 v1(8457.51,6392.96)
TX: U3.35 U4.3 | length 2502.7
  Top Layer w10: U4.3 7707.51,4554.42 v1(7707.51,4702.96) ; v1(8467.51,6492.96) 8467.51,6502.96 8577.51,6612.96 U3.35
  Bottom Layer w10: v1(7707.51,4702.96) 8507.51,5502.96 8507.51,6452.96 v1(8467.51,6492.96)
pads on no net: SCREW1.1 SCREW2.1 SCREW3.1 SW2.2 SW2.4 SW3.2 SW3.4 SW4.2 SW4.4 SW5.2 SW5.4 SW6.2 SW6.4 SW7.2 SW7.4 SW8.2 SW8.4 SW9.2 SW9.4 SW10.2 SW10.4 SW11.2 SW11.4 SW12.2 SW12.4 SW13.2 SW13.4 SW14.2 SW14.4 SW15.2 SW15.4 SW16.2 SW16.4 SW17.2 SW17.4 U3.4 U3.5 U3.6 U3.14 U3.18 U3.19 U3.20 U3.21 U3.22 U3.23 U3.24 U3.32 U4.4 U4.7 U4.8 U4.9 U4.10 U4.11 U4.12 U4.13 U4.14 U4.15 U6.13 U6.14 U6.16 U6.17 U6.18 U6.19 U6.20 U6.21 U6.22 U6.23 U6.24 U6.25 USB1.1 USB1.2 USB1.3 USB1.4 USB1.A8 USB1.B8

## Polygon pours and split planes (outlines as drawn)
GND on Top Layer (solid, remove dead copper, pour order 0): 3000,7320 10020,7320 10020,3000 3000,3000

## Keep-outs
Board Outline Layer:
  lines w10: 3535,4342.44 ccw(c4007.44,4342.44) 4007.44,3870 8592.56,3870 ccw(c8592.56,4342.44) 9065,4342.44 9065,6347.56 ccw(c8592.56,6347.56) 8592.56,6820 4007.44,6820 ccw(c4007.44,6347.56) 3535,6347.56 3535,4342.44

## Silkscreen, mask and mechanical layers (free items; w line width, h text height)
Top Silkscreen Layer:
  text "stepper 1" at 5780,6660 h120
  text "stepper 2" at 6960,6660 h120
  text "optical" at 8680,5400 h120 r90
  text "imu" at 8680,4820 h120 r90